# EAGLE board dp_tape_cutting_robot-logic (EAGLE 6.3)
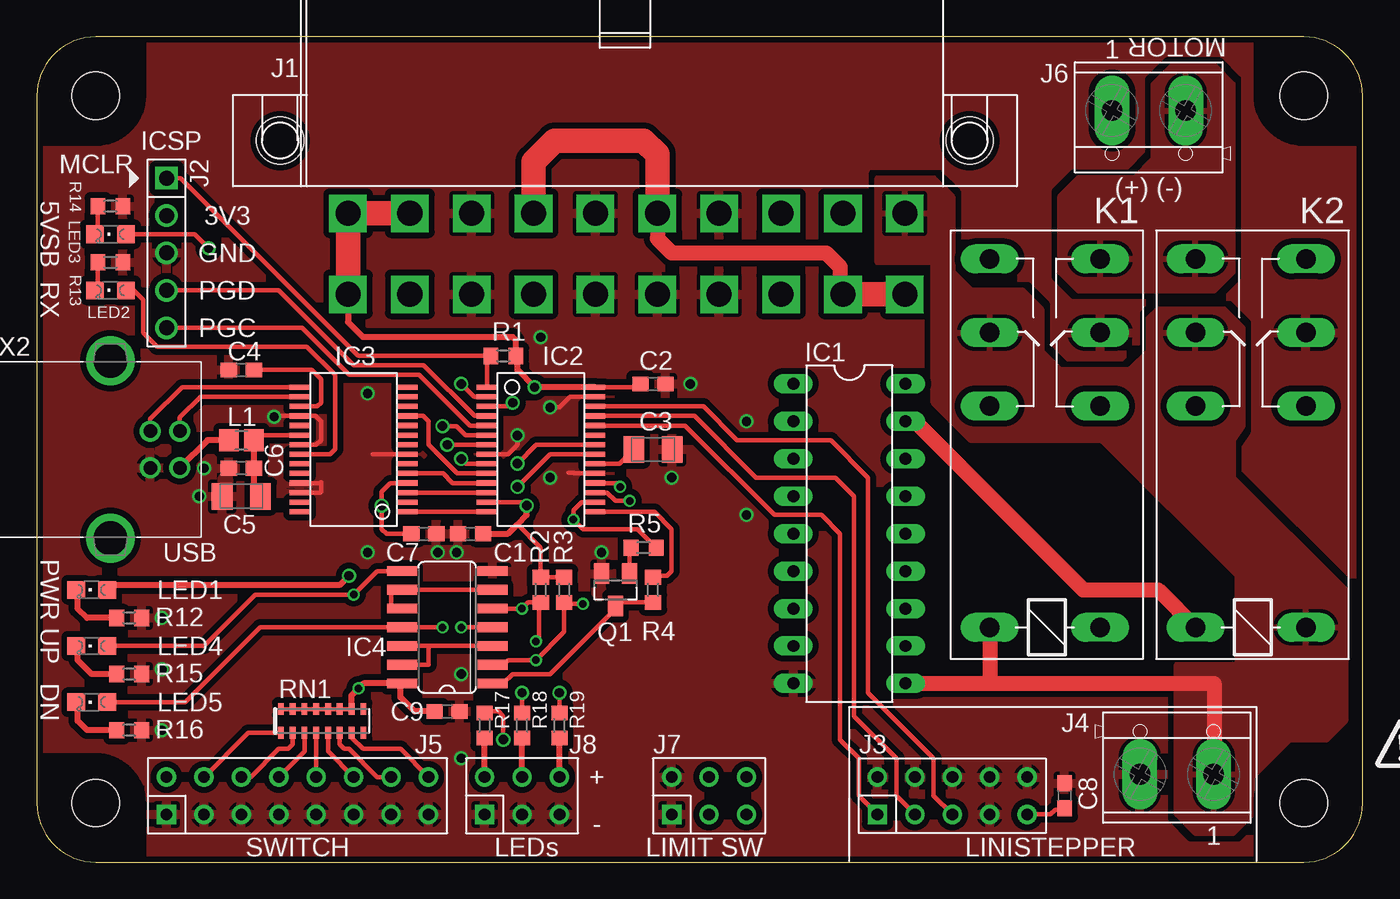
[diagram p0: board, top side]
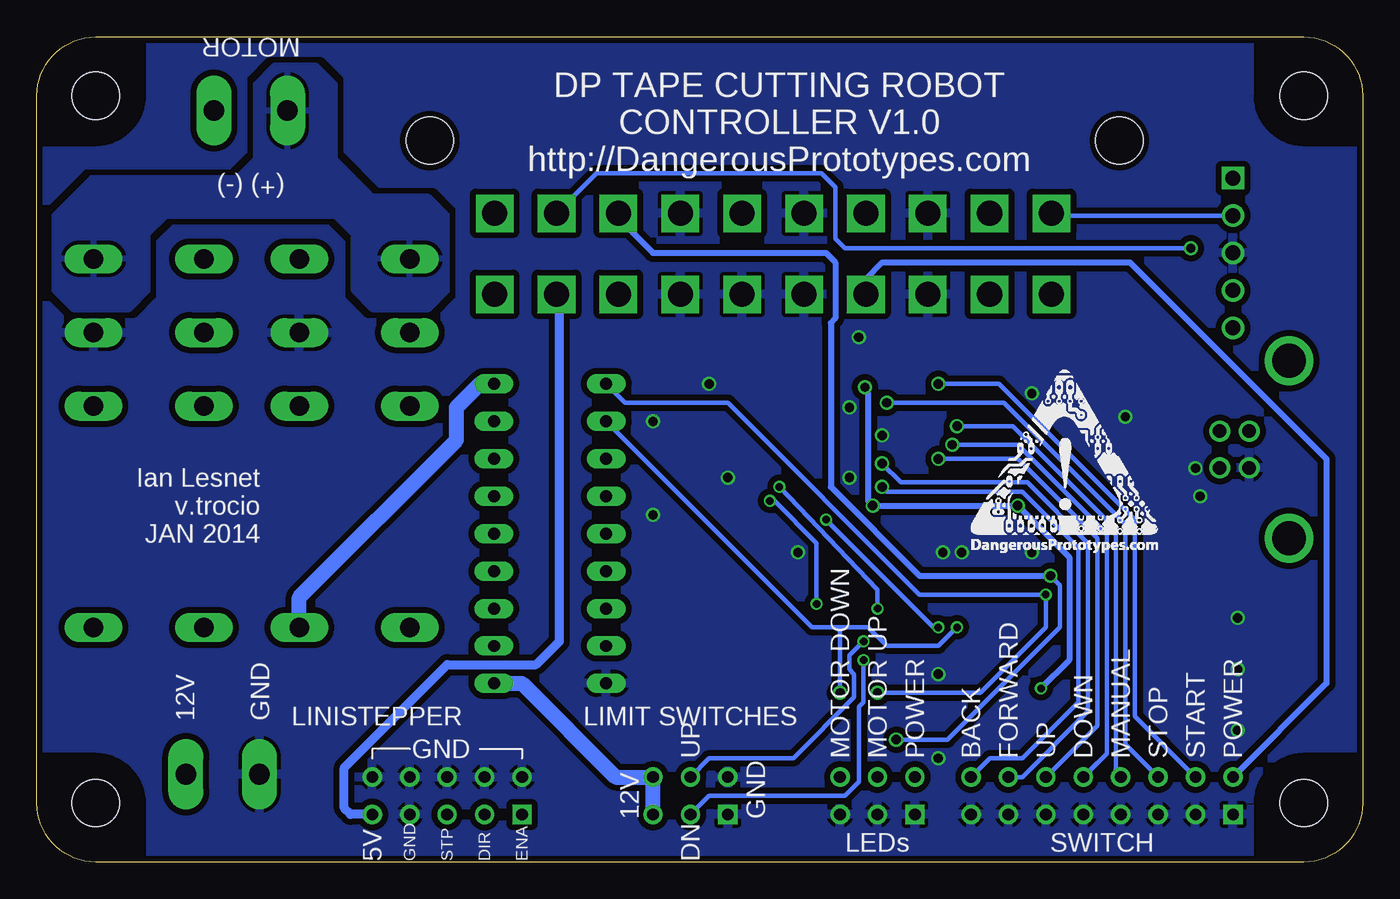
[diagram p1: board, bottom side, seen from below]

Size 90 x 56 mm. Coordinates in mm from the lower left corner, seen from the top.
Copper layers (1*16): Top 0.035mm / dielectric 1.5mm / Bottom 0.035mm
Design rules "SeeedStudio_DRU_no_angle_2layer": minimum track width 6mil, minimum drill 12mil, track to track 6mil, track to pad 6mil, pad to pad 6mil, via to via 6mil, smd to smd 0mil, copper to edge 10mil, drill to drill 10mil, minimum pad ring 10mil, minimum via ring 6mil, stop-mask expansion 2mil, vias tented up to drill 25mil, thermal gap 10mil

## Footprints (pad centres in the part's own frame; a part is rotated, then mirrored left to right if it is on the bottom)
C603 = smd 1.1 x 1: 1 -0.85,0; 2 0.85,0
SMC_A = smd 1.4 x 1.8: + -1.3,0; - 1.3,0
DIL18 = drill 0.813 long: 1 -10.16,-3.81; 2 -7.62,-3.81; 3 -5.08,-3.81; 4 -2.54,-3.81; 5 0,-3.81; 6 2.54,-3.81; 7 5.08,-3.81; 8 7.62,-3.81; 9 10.16,-3.81; 10 10.16,3.81; 11 7.62,3.81; 12 5.08,3.81; 13 2.54,3.81; 14 0,3.81; 15 -2.54,3.81; 16 -5.08,3.81; 17 -7.62,3.81; 18 -10.16,3.81
SSOP-28 = smd 0.348 x 1.397: 1 -4.225,-3.656; 2 -3.575,-3.656; 3 -2.925,-3.656; 4 -2.275,-3.656; 5 -1.625,-3.656; 6 -0.975,-3.656; 7 -0.325,-3.656; 8 0.325,-3.656; 9 0.975,-3.656; 10 1.625,-3.656; 11 2.275,-3.656; 12 2.925,-3.656; 13 3.575,-3.656; 14 4.225,-3.656; 15 4.225,3.656; 16 3.575,3.656; 17 2.925,3.656; 18 2.275,3.656; 19 1.625,3.656; 20 0.975,3.656; 21 0.325,3.656; 22 -0.325,3.656; 23 -0.975,3.656; 24 -1.625,3.656; 25 -2.275,3.656; 26 -2.925,3.656; 27 -3.575,3.656; 28 -4.225,3.656
SO14 = smd 0.66 x 2.032: 1 -3.81,-3.073; 2 -2.54,-3.073; 3 -1.27,-3.073; 4 0,-3.073; 5 1.27,-3.073; 6 2.54,-3.073; 7 3.81,-3.073; 8 3.81,3.073; 9 2.54,3.073; 10 1.27,3.073; 11 0,3.073; 12 -1.27,3.073; 13 -2.54,3.073; 14 -3.81,3.073
CON_ATX_PWR_90DEG = drill 1.7 square: 1 18.8,4.93; 2 14.6,4.93; 3 10.4,4.93; 4 6.2,4.93; 5 2,4.93; 6 -2.2,4.93; 7 -6.4,4.93; 8 -10.6,4.93; 9 -14.8,4.93; 10 -19,4.93; 11 18.8,10.43; 12 14.6,10.43; 13 10.4,10.43; 14 6.2,10.43; 15 2,10.43; 16 -2.2,10.43; 17 -6.4,10.43; 18 -10.6,10.43; 19 -14.8,10.43; 20 -19,10.43 | hole 3.2: 23.4,0; -23.4,0
HEADER_PRG_1X05 = drill 1.016 square: 1 -5.08,0 | drill 1.016: 2 -2.54,0; 3 0,0; 4 2.54,0; 5 5.08,0
M2X5 = drill 0.8 square: 1 -5.08,-1.27 | drill 0.8: 2 -5.08,1.27; 3 -2.54,-1.27; 4 -2.54,1.27; 5 0,-1.27; 6 0,1.27; 7 2.54,-1.27; 8 2.54,1.27; 9 5.08,-1.27; 10 5.08,1.27
TERMINAL_BLOCK_2P_5 = drill 1.4 pad 2.38 long: 1 2.5,-0.45; 2 -2.5,-0.45
M2X8 = drill 0.8 square: 1 -8.89,-1.27 | drill 0.8: 2 -8.89,1.27; 3 -6.35,-1.27; 4 -6.35,1.27; 5 -3.81,-1.27; 6 -3.81,1.27; 7 -1.27,-1.27; 8 -1.27,1.27; 9 1.27,-1.27; 10 1.27,1.27; 11 3.81,-1.27; 12 3.81,1.27; 13 6.35,-1.27; 14 6.35,1.27; 15 8.89,-1.27; 16 8.89,1.27
M2X3 = drill 0.8 square: 1 -2.54,-1.27 | drill 0.8: 2 -2.54,1.27; 3 0,-1.27; 4 0,1.27; 5 2.54,-1.27; 6 2.54,1.27
G2R2 = drill 1.321 long: 1 -2.54,-3.683; 2 -2.54,3.81; O1 12.471,3.81; O2 12.471,-3.683; P1 17.45,3.81; P2 17.45,-3.683; S1 22.454,3.81; S2 22.454,-3.683
FB805 = smd 1.3 x 1.5: 1 -0.85,0; 2 0.85,0
LED-805 = smd 1.2 x 1.2: A 0,-1.05; C 0,1.05
DP9056_V1 = hole 3.2: -41,-24; 41,-24; 41,24; -41,24
SOT-23 = smd 1 x 1.4: 1 -0.95,-1.1; 2 0.95,-1.1; 3 0,1.1
R603 = smd 1 x 1.1: 1 -0.85,0; 2 0.85,0
CAT16-F8/CAT16-J8 = smd 0.4 x 0.8: 1 -2.4,-0.8; 2 -1.6,-0.8; 3 -0.8,-0.8; 4 0,-0.8; 5 0.8,-0.8; 6 1.6,-0.8; 7 2.4,-0.8; 8 3.2,-0.8; 9 3.2,0.8; 10 2.4,0.8; 11 1.6,0.8; 12 0.8,0.8; 13 0,0.8; 14 -0.8,0.8; 15 -1.6,0.8; 16 -2.4,0.8
85-32004-10X = drill 0.92 pad 1.27: 1 4.71,-1.25; 2 4.71,1.25; 3 2.71,1.25; 4 2.71,-1.25 | drill 2.3 pad 3: M1 0,6.02; M2 0,-6.02

## Placement (x,y rotation side)
C1  100nF  [C603]  29.44,22.29 180 top
C2  100nF  [C603]  41.82,32.45 180 top
C3  10uF 16V  [SMC_A]  41.82,28 0 top
C4  100nF  [C603]  13.88,33.4 0 top
C5  10uF 16V  [SMC_A]  13.88,24.82 180 top
C6  100nF  [C603]  13.88,26.73 0 top
C7  100nF  [C603]  26.27,22.29 180 top
C8  100nF  [C603]  69.76,4.51 270 top
C9  100nF  [C603]  27.86,10.22 180 top
IC1  [DIL18]  55.16,22.29 270 top
IC2  IC_UC_PIC24FJ64GA002  [SSOP-28]  34.2,28 270 top
IC3  IC_FT232RL  [SSOP-28]  21.5,28 90 top
IC4  74LV00  [SO14]  27.86,15.94 90 top
J1  CON_ATX_PWR-90DEG  [CON_ATX_PWR_90DEG]  39.92,48.95 180 top
J2  CON_HEADER_PRG_PIC_ICSP0.1INCH_A  [HEADER_PRG_1X05]  8.8,41.33 270 top
J3  CON_HEADER_2X05-PTH  [M2X5]  62.14,4.51 0 top
J4  CON_TERMINAL_BLOCK_02-5MM  [TERMINAL_BLOCK_2P_5]  77.38,6.41 0 top
J5  CON_HEADER_2X08  [M2X8]  17.7,4.51 0 top
J6  CON_TERMINAL_BLOCK_02-5MM  [TERMINAL_BLOCK_2P_5]  75.48,50.54 180 top
J7  CON_HEADER_2X03-PTH  [M2X3]  45.63,4.51 0 top
J8  CON_HEADER_2X03-PTH  [M2X3]  32.94,4.51 0 top
K1  G2R2  [G2R2]  68.5,18.48 90 top
K2  G2R2  [G2R2]  82.47,18.48 90 top
L1  700mA  [FB805]  13.88,28.64 0 top
LED1  [LED-805]  3.72,18.48 90 top
LED2  [LED-805]  4.99,38.8 90 top
LED3  [LED-805]  4.99,42.61 90 top
LED4  [LED-805]  3.72,14.67 90 top
LED5  [LED-805]  3.72,10.86 90 top
PCB2  PCB_DP_RECTANGLE-56X90  [DP9056_V1]  45,28 0 top
Q1  BC818  [SOT-23]  39.28,18.48 180 top
R1  [R603]  31.66,34.35 0 top
R2  10K  [R603]  34.2,18.48 90 top
R3  10K  [R603]  35.79,18.48 90 top
R4  1K  [R603]  41.82,18.48 270 top
R5  1.1K  [R603]  41.19,21.33 180 top
R12  10K  [R603]  6.26,16.57 180 top
R13  1K1  [R603]  4.99,40.7 180 top
R14  10K  [R603]  4.99,44.51 180 top
R15  1K1  [R603]  6.26,12.76 180 top
R16  1K1  [R603]  6.26,8.95 180 top
R17  10K  [R603]  30.39,9.27 270 top
R18  [R603]  32.94,9.27 270 top
R19  [R603]  35.48,9.27 270 top
RN1  10K-8  [CAT16-F8/CAT16-J8]  18.96,9.59 0 top
U$1  FRAME_DINA4_L  [DP_LOGO]  92.62,7.05 0 top
U$3  [DP_LOGO_ART_0.5X0.5]  26.59,21.02 0 bottom
X2  MINI-USB_4P-85-32004-10X  [85-32004-10X]  4.99,28 0 top

## Library data of the parts
C1-C9 IC1-IC3 J1-J8 L1 LED1-LED5 Q1 R1-R5 R12-R19 RN1 U$3 = dp_devices
IC4 = 74xx-eu
K1 K2 = relay; MF: OMRON COMPONENTS USA; MPN: G2R-2-DC6; OC_FARNELL: unknown; OC_NEWARK: 89C5317
PCB2 = dp_devices; PCB_SIZE: DP9056_V1
U$1 = dp_devices; LICENSE: CC-BY-SA; PROJECT: DP Tape Cutting Robot Controller V1.0; URL1: http://DangerousPrototypes.com; URL2: DangerousPrototypes.com
X2 = con-cypressindustries; OC_FARNELL: unknown; OC_NEWARK: unknown

## Nets
5VSB: J1.9 LED3.A
+3V3: C1.1 C2.2 C7.2 C9.2 IC2.13 IC2.28 IC3.4 IC4.14 J1.1 J1.2 J1.11 J2.2 R1.2 R2.2 R3.2 RN1.10 RN1.11 RN1.12 RN1.13 RN1.14 RN1.15 RN1.16
+5V: C8.2 J1.4 J1.6 J1.19 J1.20 J3.9
+12V: IC1.10 J1.10 J4.1 J7.5 J7.6 K1.2 K1.P1 K2.1 K2.P1
B_BACK: IC2.21 J5.16 RN1.7
B_DOWN: IC2.7 J5.10 RN1.4
B_FORWARD: IC2.22 J5.14 RN1.6
B_MANUAL: IC2.6 J5.8 RN1.3
B_START: IC2.2 J5.4 RN1.1
B_STOP: IC2.3 J5.6 RN1.2
B_UP: IC2.9 J5.12 RN1.5
CTRL_DN: IC2.15 R4.1
CTRL_UP: IC2.16 IC4.4 R5.1
CTS: IC2.10 IC3.11
DIR: IC2.25 J3.3
ENA: IC2.24 J3.1
GND: C1.2 C2.1 C3.- C4.1 C5.- C6.1 C7.1 C8.1 C9.1 IC1.9 IC2.8 IC2.19 IC2.27 IC3.7 IC3.18 IC3.21 IC3.25 IC3.26 IC4.7 J1.3 J1.5 J1.7 J1.13 J1.15 J1.16 J1.17 J2.3 J3.2 J3.4 J3.6 J3.7 J3.8 J3.10 J4.2 J5.1 J5.3 J5.5 J5.7 J5.9 J5.11 J5.13 J5.15 J7.1 J7.2 J8.1 J8.3 J8.5 K1.P2 K2.P2 Q1.2 R12.1 R13.1 R14.1 R15.1 R16.1 X2.4
ICSP_MCLR: IC2.1 J2.1 R1.1
ICSP_PGC: IC2.5 J2.5
ICSP_PGD: IC2.4 J2.4
LED_RX: IC3.22 LED2.A
MOTOR+: J6.1 K1.S1 K2.S2
MOTOR-: J6.2 K1.S2 K2.S1
MOTOR_DN: IC1.2 IC4.11 LED5.A R19.1
MOTOR_UP: IC1.1 IC4.8 LED4.A R18.1
N$1: C3.+ IC2.20
N$2: IC1.17 K2.2
N$4: IC4.3 IC4.12 IC4.13
N$5: LED1.C R12.2
N$6: IC4.1 Q1.3 R4.2
N$7: Q1.1 R5.2
N$9: LED2.C R13.2
N$11: C4.2 IC3.17
N$12: LED3.C R14.2
N$13: LED4.C R15.2
N$14: LED5.C R16.2
N$15: IC1.18 K1.1
N$17: IC3.16 X2.2
N$18: IC3.15 X2.3
N$19: C5.+ C6.2 IC3.20 L1.2
N$20: L1.1 X2.1
N$24: IC4.6 IC4.9 IC4.10
N$27: J8.2 R17.2
N$29: J8.4 R18.2
N$30: J8.6 R19.2
PWR_GOOD: J1.8 LED1.A R17.1
PWR_ON: J1.14 J5.2
RTS: IC2.12 IC3.3
RX: IC2.11 IC3.5
STP: IC2.26 J3.5
SW_DN: IC2.17 IC4.2 J7.3 R3.1
SW_UP: IC2.18 IC4.5 J7.4 R2.1
TX: IC2.14 IC3.1

## Tracks (layer width: path | path; a pad name or v marks a point on that pad's centre or on a via)
5VSB  (via drill 0.64)
  Top 0.305: LED3.A 10.71,42.61 v11.66,41.65
  Bottom 0.305: v11.66,41.65 35.16,41.65 35.79,42.29 35.79,45.78 36.74,46.73 52.01,46.73 J1.9
+3V3  (via drill 0.51, 0.64)
  Top 0.305: IC3.4 23.99,25.73 23.41,25.14 v23.41,24.19 23.41,22.6 23.73,22.29 C7.2 | IC2.28 40.65,32.22 40.87,32.45 C2.2 | IC2.13 33.02,24.43 v33.25,24.19 | RN1.16 RN1.15 RN1.14 RN1.13 RN1.12 RN1.11 RN1.10 | R3.2 R2.2 34.2,21.33 32.62,22.92
  Top 0.406: IC2.28 v33.79,32.22 32.62,33.4 32.62,34.25 R1.2 32.52,35.41 32.3,35.62 22.14,35.62 21.12,36.64 J1.11 | C1.1 31.98,22.29 32.62,22.92 33.25,23.55 v33.25,24.19 | RN1.10 21.36,11.31 v21.84,11.79 22.18,12.12 IC4.14 24.68,12.02 24.68,11.17 25.63,10.22 C9.2
  Top 1.676: J1.2 J1.1 J1.11
  Bottom 0.305: J2.2 20.97,43.88 J1.1
  Bottom 0.406: v33.79,32.22 33.98,32.22 33.57,31.81 33.57,24.51 v33.25,24.19 v23.41,24.19 19.92,20.7 19.92,13.71 v21.84,11.79
+5V
  Top 0.305: J3.9 68.81,3.24 69.13,3.55 69.66,3.55 C8.2
  Top 1.016: J1.6 42.12,42.31 43.09,41.33 53.57,41.33 54.52,40.38 54.52,38.72 J1.19
  Top 1.676: J1.4 33.72,47.52 35.16,48.95 41.19,48.95 42.12,48.03 J1.6 | J1.20 J1.19
  Bottom 0.61: J3.9 68.71,3.24 69.13,3.66 69.13,6.41 62.14,13.4 56.11,13.4 54.52,14.98 54.52,38.33 J1.19
+12V
  Top 1.016: IC1.10 64.69,12.12 | 64.69,12.12 79.93,12.12 79.93,6 J4.1 | K1.2 64.69,12.12
  Bottom 1.016: J7.5 J7.6 50.71,5.78 57.06,12.12 IC1.10
  pour Top (isolate 0.406): 57.06,46.42 60.88,46.42 62.14,45.14 62.14,40.06 63.41,38.8 66.91,38.8 68.18,37.53 68.18,34.67 69.45,33.4 74.21,33.4 75.48,34.67 75.48,36.89 76.12,37.53 80.56,37.53 81.83,36.25 81.83,29.59 81.19,28.64 81.19,26.1 88.81,18.48 88.81,9.59 87.54,8.32 85,8.32 82.47,5.78 82.47,3.24 81.19,1.97 78.66,1.97 77.38,3.24 77.38,13.4 81.51,13.4 81.51,19.43 72.31,28.64 63.41,28.64 60.88,31.18 60.88,40.7 57.06,40.7
B_BACK  (via drill 0.64)
  Top 0.305: IC2.21 34.83,27.68 v32.62,25.46 | RN1.7 21.36,8.46 22.14,7.68 24.68,7.68 J5.16
  Bottom 0.305: v32.62,25.46 32.3,25.14 23.09,25.14 19.28,21.33 19.28,10.86 23.09,7.05 25.31,7.05 J5.16
B_DOWN  (via drill 0.64)
  Top 0.305: RN1.4 J5.10 | IC2.7 v27.85,28.32 v27.86,28.32
  Bottom 0.305: 18.01,6.73 J5.10 17.38,7.36 17.38,22.29 23.41,28.32 v27.86,28.32
B_FORWARD  (via drill 0.64)
  Top 0.305: RN1.6 20.56,7.99 20.87,7.68 21.19,7.68 23.09,5.78 J5.14 | IC2.22 33.89,28.32 v32.62,27.05
  Bottom 0.305: v32.62,27.05 31.35,25.78 22.77,25.78 18.65,21.65 18.65,10.22 23.09,5.78 J5.14
B_MANUAL  (via drill 0.64)
  Top 0.305: RN1.3 18.16,7.52 J5.8 | IC2.6 29.1,28.98 28.49,29.59 v27.54,29.59
  Bottom 0.305: v27.54,29.59 23.73,29.59 16.74,22.6 16.74,6.09 J5.8
B_START  (via drill 0.64)
  Top 0.305: RN1.1 14.35,8.79 J5.4 | IC2.2 29.68,31.57 v28.81,32.45
  Bottom 0.305: v28.81,32.45 24.68,32.45 15.47,23.24 15.47,9.9 J5.4
B_STOP  (via drill 0.64)
  Top 0.305: J5.6 14.52,5.78 16.43,7.68 17.06,7.68 17.36,7.99 RN1.2 | IC2.3 32.05,30.93 v32.3,31.18
  Bottom 0.305: v32.3,31.18 24.36,31.18 16.11,22.92 16.11,8 J5.6
B_UP  (via drill 0.64)
  Top 0.305: RN1.5 19.77,7.52 J5.12 | IC2.9 29.15,27.03 v28.81,27.37
  Bottom 0.305: v28.81,27.37 23.41,27.37 18.01,21.97 18.01,9.27 J5.12
CTRL_DN
  Top 0.305: R4.1 41.93,19.43 42.78,19.43 43.09,19.75 43.09,22.6 41.92,23.78 IC2.15
CTRL_UP  (via drill 0.51)
  Top 0.305: IC2.16 36.98,24.43 36.43,23.87 v36.43,23.24 37.06,22.6 40.77,22.6 R5.1 42.14,21.44 | IC4.4 v28.81,15.94
  Bottom 0.305: v28.81,15.94 29.12,15.94 v36.43,23.24
CTS
  Top 0.305: IC2.10 28.53,26.38 26.59,28.32 26.59,29.91 26.21,30.28 IC3.11
DIR
  Top 0.305: IC2.25 44.63,30.28 48.81,26.1 54.21,26.1 55.48,24.82 55.48,9.9 58.34,7.05 58.34,4.51 J3.3
ENA
  Top 0.305: IC2.24 44.01,29.62 50.08,23.55 53.26,23.55 54.52,22.29 54.52,8.32 55.8,7.05 55.8,4.51 J3.1
GND  (via drill 0.64)
  Top 0.305: IC2.27 36.19,31.57 35.48,30.86 v34.84,30.86 | IC2.19 36.46,26.38 36.43,26.41 36.11,26.41 | IC3.7 22.78,27.68 | IC3.26 19.21,25.07 19.28,25.14 19.28,25.78 19.23,25.73 IC3.25 | IC2.8 31.98,27.68 32.62,28.32 v32.62,28.95 | v16.11,30.22 16.16,30.28 IC3.18 18.91,30.28 19.28,29.91 19.28,28.64 18.97,28.32 IC3.21
  other vias: 43.09,26.1 27.22,21.02 28.49,21.02 22.46,21.02 34.84,26.1 8.49,16.57 8.49,13.08 8.49,8.95 48.17,29.91 48.17,23.55 44.37,32.45 34.2,35.62 11.03,24.82 11.34,26.73 28.81,12.76 38.33,21.02 22.46,31.81 28.81,7.05
  pour Bottom (isolate 0.406, rank 6): -1.36,56.58 90.09,56.58 90.09,-0.57 -0.09,-0.57
  pour Top (isolate 0.406, rank 6): -1.36,56.58 90.09,56.58 90.09,-0.57 -0.09,-0.57
ICSP_MCLR
  Top 0.305: IC2.1 30.55,34.08 R1.1 21.82,34.35 9.76,46.42 J2.1
ICSP_PGC
  Top 0.305: IC2.5 29.4,29.62 25.95,33.08 21.19,33.08 18.01,36.25 J2.5
ICSP_PGD
  Top 0.305: IC2.4 29.71,30.28 26.27,33.72 21.5,33.72 16.43,38.8 J2.4
LED_RX
  Top 0.305: LED2.A 6.58,38.8 7.22,38.16 7.22,35.94 8.17,34.98 18.33,34.98 20.23,33.08 20.23,28 19.91,27.68 IC3.22
MOTOR+
  pour Bottom: 71.03,54.03 73.89,54.03 75.16,52.77 75.16,47.69 76.43,46.42 86.28,46.42 88.81,43.88 88.81,38.8 87.54,37.53 83.73,37.53 82.47,38.8 82.47,42.61 81.19,43.88 69.76,43.88 68.5,42.61 68.5,38.8 67.22,37.53 63.41,37.53 62.14,38.8 62.14,43.88 63.41,45.14 67.22,45.14 69.76,47.69 69.76,52.77
MOTOR-
  pour Top: 75.8,52.77 75.8,47.69 74.53,46.42 70.72,46.42 69.45,45.14 69.45,40.06 70.72,38.8 79.93,38.8 81.19,40.06 81.19,52.77 79.93,54.03 77.07,54.03
MOTOR_DN  (via drill 0.51, 0.64)
  Top 0.305: R19.1 v35.48,11.49 | LED5.A 10.07,10.86 15.15,15.94 IC4.11 v27.54,15.94
  Bottom 0.305: v35.48,11.49 35.48,15.94 | IC1.2 37.38,15.94 35.48,15.94 | v27.54,15.94 28.81,14.67 32.3,14.67 33.57,15.94 35.48,15.94
MOTOR_UP  (via drill 0.51, 0.64)
  Top 0.305: R18.1 v32.94,11.49 | IC4.8 23.09,19.75 v21.5,18.16 14.84,18.16 11.34,14.67 LED4.A
  Bottom 0.305: v32.94,11.49 25.95,11.49 21.5,15.94 v21.5,18.16 30.08,18.16 43.09,31.18 50.08,31.18 IC1.1
N$1
  Top 0.305: IC2.20 39.55,27.03 C3.+
N$2
  Top 1.016: IC1.17 59.6,29.91 71.03,18.48 76.12,18.48 K2.2
N$4
  Top 0.305: IC4.13 26.59,13.4 26.59,14.67 | 26.59,14.67 28.49,14.67 IC4.3 | IC4.12 26.59,14.67
N$5
  Top 0.406: R12.2 3.41,16.57 2.77,17.21 2.77,18.38 LED1.C
N$6
  Top 0.305: R4.2 39.53,17.62 Q1.3 39.28,17.21 34.84,12.76 32.3,12.76 31.66,12.12 IC4.1
N$7
  Top 0.305: Q1.1 40.23,21.23 R5.2
N$9
  Top 0.305: R13.2 4.14,39 LED2.C
N$11
  Top 0.305: C4.2 18.65,33.4 19.28,32.76 19.28,31.18 19.03,30.93 IC3.17
N$12
  Top 0.305: R14.2 4.14,42.81 LED3.C
N$13
  Top 0.406: R15.2 3.72,12.76 2.77,13.71 2.77,14.57 LED4.C
N$14
  Top 0.406: R16.2 3.41,8.95 2.77,9.59 2.77,10.76 LED5.C
N$15
  Bottom 1.016: K1.1 72.18,17.97 61.51,28.64 61.51,30.86 59.92,32.45 IC1.18
N$17
  Top 0.305: IC3.16 11.11,31.57 9.7,30.17 X2.2
N$18
  Top 0.305: IC3.15 9.85,32.22 7.7,30.07 X2.3
N$19
  Top 0.305: IC3.20 15.07,28.98 L1.2
  Top 0.406: L1.2 C6.2 14.73,25.28 C5.+
N$20
  Top 0.406: L1.1 11.59,28.64 X2.1
N$24
  Top 0.305: IC4.6 IC4.9 24.04,18.48 24.04,17.21 IC4.10
N$27
  Top 0.406: J8.2 R17.2
N$29
  Top 0.406: J8.4 R18.2
N$30
  Top 0.406: J8.6 R19.2
PWR_GOOD  (via drill 0.64)
  Top 0.305: v31.66,8.32 31.66,9.9 31.35,10.22 30.39,10.22 R17.1
  Top 0.406: LED1.A 5.09,18.79 20.55,18.79 v21.19,19.43
  Bottom 0.305: v21.19,19.43 20.55,18.79 20.55,15.94 28.17,8.32 v31.66,8.32
  Bottom 0.406: J1.8 50.52,43.68 48.17,41.33 36.43,41.33 35.79,40.7 35.79,36.89 36.11,36.57 36.11,25.46 30.08,19.43 v21.19,19.43
PWR_ON
  Bottom 0.406: J1.14 33.72,39.6 32.62,40.7 15.79,40.7 2.45,27.37 2.45,12.12 J5.2
RTS
  Top 0.305: IC2.12 IC3.3
RX
  Top 0.305: IC2.11 28.22,25.73 27.57,26.38 IC3.5
STP
  Top 0.305: IC2.26 45.25,30.93 47.54,28.64 53.89,28.64 56.43,26.1 56.43,11.49 60.88,7.05 60.88,4.51 J3.5
SW_DN  (via drill 0.51)
  Top 0.305: IC4.2 31.66,13.4 31.98,13.71 v33.89,13.71 35.79,15.62 35.79,17.52 | R3.1 35.79,17.52 | 35.79,17.52 v37.06,17.52 | IC2.17 38.72,25.07 39.28,24.51 v40.24,24.51
  Bottom 0.305: J7.3 44.37,4.51 35.16,4.51 34.2,5.46 34.2,10.54 33.89,10.86 v33.89,13.71 | v40.24,24.51 39.92,24.51 37.06,21.65 v37.06,17.52
SW_UP  (via drill 0.51)
  Top 0.305: R2.1 34.1,17.52 34.1,15.2 v33.89,14.98 | R2.1 34.2,17.52 | IC4.5 v32.94,17.21 33.35,17.62 R2.1 | IC2.18 39.34,25.73 v39.6,25.46
  Bottom 0.305: J7.4 44.37,7.05 38.65,7.05 34.52,11.17 34.52,12.76 34.84,13.08 34.84,14.03 v33.89,14.98 | v39.6,25.46 32.94,18.48 v32.94,17.21
TX
  Top 0.305: IC2.14 IC3.1

## Text on the board
tPlace: MOTOR | ICSP | MCLR | (+) (-) | 3V3 | 5VSB | GND | RX | PGD | PGC | USB | PWR | UP | DN | + | - | SWITCH | LEDs | LIMIT SW | LINISTEPPER
bPlace: MOTOR | DP TAPE CUTTING ROBOT / CONTROLLER V1.0 / http://DangerousPrototypes.com | (+) (-) | Ian Lesnet / v.trocio / JAN 2014 | LIMIT SWITCHES | LINISTEPPER | GND | 12V | POWER | START | STOP | MANUAL | DOWN | UP | FORWARD | BACK | POWER | MOTOR UP | MOTOR DOWN | UP | GND | GND | 12V | SWITCH | LEDs | DN | ENA | DIR | STP | GND | 5V
Reference: ATX POWER | MOTOR | MOTOR + | MOTOR - | 5VSB | RX | USB | POWER | MOTOR UP | MOTOR DOWN | GND | SW_UP | 12V | GND | GND | GND | GND | GND | GND | 12V | POWER ON | START | STOP | MANUAL | DOWN | UP | FORWARD | BACK | DIR | STOP | GND | 5V | POWER LED | MOTOR UP | MOTOR DOWN | GND | SW_DN | 12V | ENABLE | SWITCHES | LEDs | LIMIT SW | LINISTEPPER